# Altium PCB JTAG20-JTAG9.PcbDoc
Units mm, origin at the board's own origin, x right, y up, seen from the top; angles counter-clockwise.
Board outline 57.8 x 14 mm, 2 copper layers (Top Layer, Bottom Layer); 5 components, 11 nets, 36 pads, 0 vias.
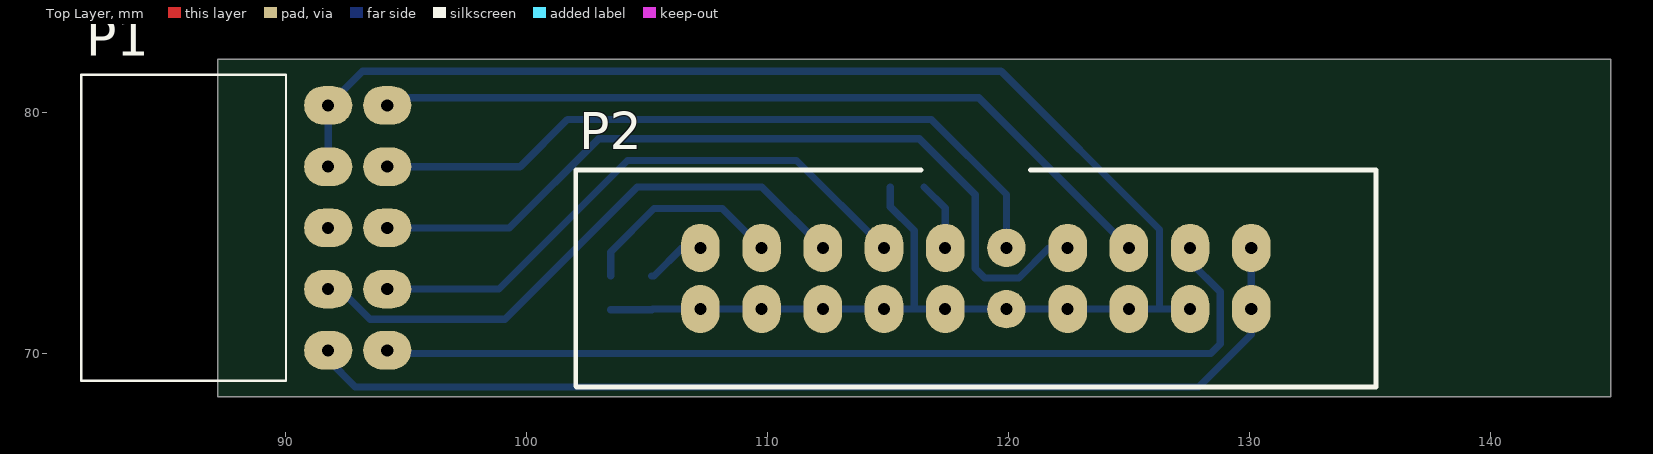
[diagram p0: Top Layer view]
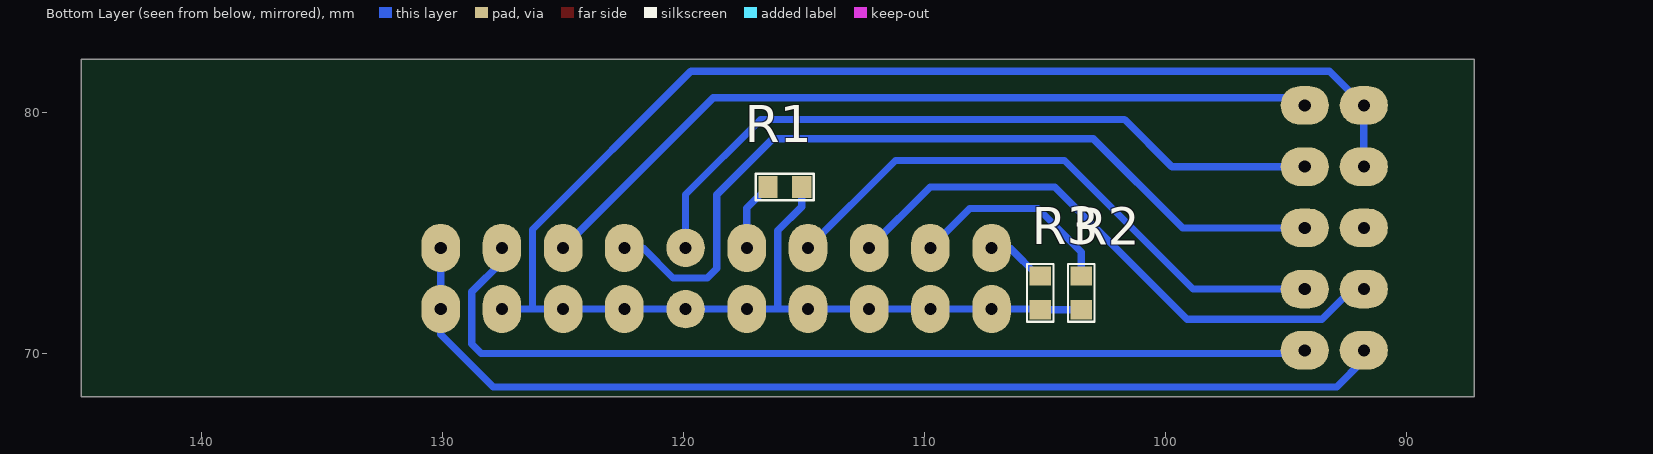
[diagram p1: Bottom Layer view, seen from below]

## Layer stack, top to bottom
Top Layer: signal copper 0.0356
Dielectric: dielectric 0.32, FR-4, Dk 4.8
Bottom Layer: signal copper 0.0356

## Board outline
87.2,68.2 145,68.2 145,82.2 87.2,82.2

## Design rules (kind name [scope] priority, off if disabled: settings)
Clearance [All] p1: gap=0.3
PolygonConnect [All] p1: connectstyle=Relief reliefconductorwidth=0.254 reliefentries=4 polygonreliefangle="90 Angle"
RoutingVias [All] p1: holewidth=0.711 width=1.27 viastyle="Through Hole" minholewidth=0.711 minwidth=1.27 maxholewidth=0.711 maxwidth=1.27
SilkscreenOverComponentPads [All] p1: minsilkscreentomaskgap=0.254
SolderMaskExpansion [All] p1: expansion=0.102
Width [All] p1: maxlimit=5 minlimit=0.254 preferedwidth=0.254
27 further rules are at their usual default settings.

## Components (designator, comment, footprint, x,y, rotation, side; value= is the part's Value field where it differs from the comment)
P1 "JTAG 9-pin" PBD-10R 93,75.2 r0 top
P2 "JTAG 20-pin" IDC-20M 122.4,73.1 r270 top
R1 "RES" C0603 115.8,76.9 r0 bottom
R2 "RES" C0603 103.5,72.5 r90 bottom
R3 "RES" C0603 105.2,72.5 r90 bottom

## Footprints (in the part's own frame and the unit in brackets; to place one, negate y for a bottom-side part, rotate by r counter-clockwise, add the part's x,y. Pads: shape width x height; smd on the part's side, far side on the other; paste and mask are expansions set on the pad)
C0603 [mm]
  rect 0.8x0.9 smd: 1(-0.7,0) 2(0.7,0)
  silkscreen extent -1.2,-0.55 1.2,0.55, body extent -0.87,-0.48 0.87,0.48, height 1.3
IDC-20M [mm]
  oval 2x1.6 hole 0.5 unplated: 1(-1.27,7.68) 2(1.27,7.68) 3(-1.27,5.14) 4(1.27,5.14) 5(-1.27,2.6) 6(1.27,2.6) 7(-1.27,0.06) 8(1.27,0.06)
  round 1.6 hole 0.5 unplated: 9(-1.27,-2.48) 10(1.27,-2.48)
  oval 2x1.6 hole 0.5: 11(-1.27,-5.02) 12(1.27,-5.02) 13(-1.27,-7.56) 14(1.27,-7.56) 15(-1.27,-10.1) 16(1.27,-10.1) 17(-1.27,-12.64) 18(1.27,-12.64) 19(-1.27,-15.18) 20(1.27,-15.18)
  silkscreen extent -4.5,-20.35 4.5,12.85
PBD-10R [mm]
  oval 2x1.6 hole 0.5: 1(-1.225,5.08) 2(1.225,5.08) 3(-1.225,2.54) 4(1.225,2.54) 5(-1.225,0) 6(1.225,0) 7(-1.225,-2.54) 8(1.225,-2.54) 9(-1.225,-5.08) 10(1.225,-5.08)
  silkscreen extent -11.48,-6.35 -2.98,6.35

## Part data
P1: library part PBD-10R
P2: library part IDC-20M
R1 R2 R3: "Resistor"

## Nets (pads, with @x,y where several pads share a name; then routed paths per layer and width w, separated by ;. In a path a pad name is that pad's centre, name@x,y a point inside that pad or via, vN(x,y) a via of type N, cw(c..) or ccw(c..) an arc to the next point about the centre after c; other vN are vias at no path point)
GND: P1.1 P1.3 P2.4 P2.6 P2.8 P2.10 P2.12 P2.14 P2.16 P2.18 P2.20 R1.1 R2.1 R3.1 | length 73.1
  Bottom Layer w0.3: P1.3 P1.1 93.195,81.7 119.7,81.7 126.27,75.13 126.27,71.83 ; R2.1 R3.1 105.23,71.83 P2.20 P2.18 P2.16 P2.14 116,71.83 ; R1.1 115.1,76.078 116.09,75.088 116.09,71.83 P2.12 P2.10 P2.8 P2.6 126.27,71.83 ; P2.4 126.27,71.83
NetP2_11: P2.11 R1.2 | length 2.9
  Bottom Layer w0.3: R1.2 117.38,76.02 P2.11
NetP2_17: P2.17 R2.2 | length 8.7
  Bottom Layer w0.3: R2.2 103.5,74.2 105.3,76 108.13,76 P2.17
NetP2_19: P2.19 R3.2 | length 2.5
  Bottom Layer w0.3: R3.2 105.3,73.2 106.47,74.37 P2.19
NRST: P1.7 P2.15 | length 24.4
  Bottom Layer w0.3: P1.7 92.257,72.66 93.507,71.41 99.11,71.41 104.6,76.9 109.77,76.9 P2.15
TCK: P1.4 P2.9 | length 30
  Bottom Layer w0.3: P1.4 99.74,77.74 101.7,79.7 116.8,79.7 119.92,76.58 P2.9
TDI: P1.2 P2.5 | length 33.5
  Bottom Layer w0.3: P1.2 94.545,80.6 118.77,80.6 P2.5
TDO: P1.8 P2.13 | length 24.3
  Bottom Layer w0.3: P1.8 98.86,72.66 104.2,78 111.21,78 P2.13
TMS: P1.6 P2.7 | length 34.5
  Bottom Layer w0.3: P1.6 99.3,75.2 103,78.9 116.3,78.9 118.63,76.57 118.63,73.51 119.02,73.12 120.438,73.12 121.688,74.37 P2.7
TRST: P1.10 P2.3 | length 39.3
  Bottom Layer w0.3: P1.10 94.355,69.99 128.4,69.99 128.79,70.38 128.79,72.548 127.54,73.798 P2.3
VCC: P1.9 P2.1 P2.2 | length 43.7
  Bottom Layer w0.3: P1.9 91.775,69.725 92.9,68.6 127.9,68.6 130.08,70.78 P2.2 P2.1
pads on no net: P1.5

## Silkscreen, mask and mechanical layers (free items; w line width, h text height)
Mechanical 1:
  the board outline again, w0.1